# Altium PCB MC_Isolation_PCB.PcbDoc
Units mil, origin at the board's own origin, x right, y up, seen from the top; angles counter-clockwise.
Board outline 6000 x 4000 mil, 2 copper layers (Top Layer, Bottom Layer); 15 components, 13 nets, 65 pads, 0 vias.
Unrouted connection lines stored in the file: 1.
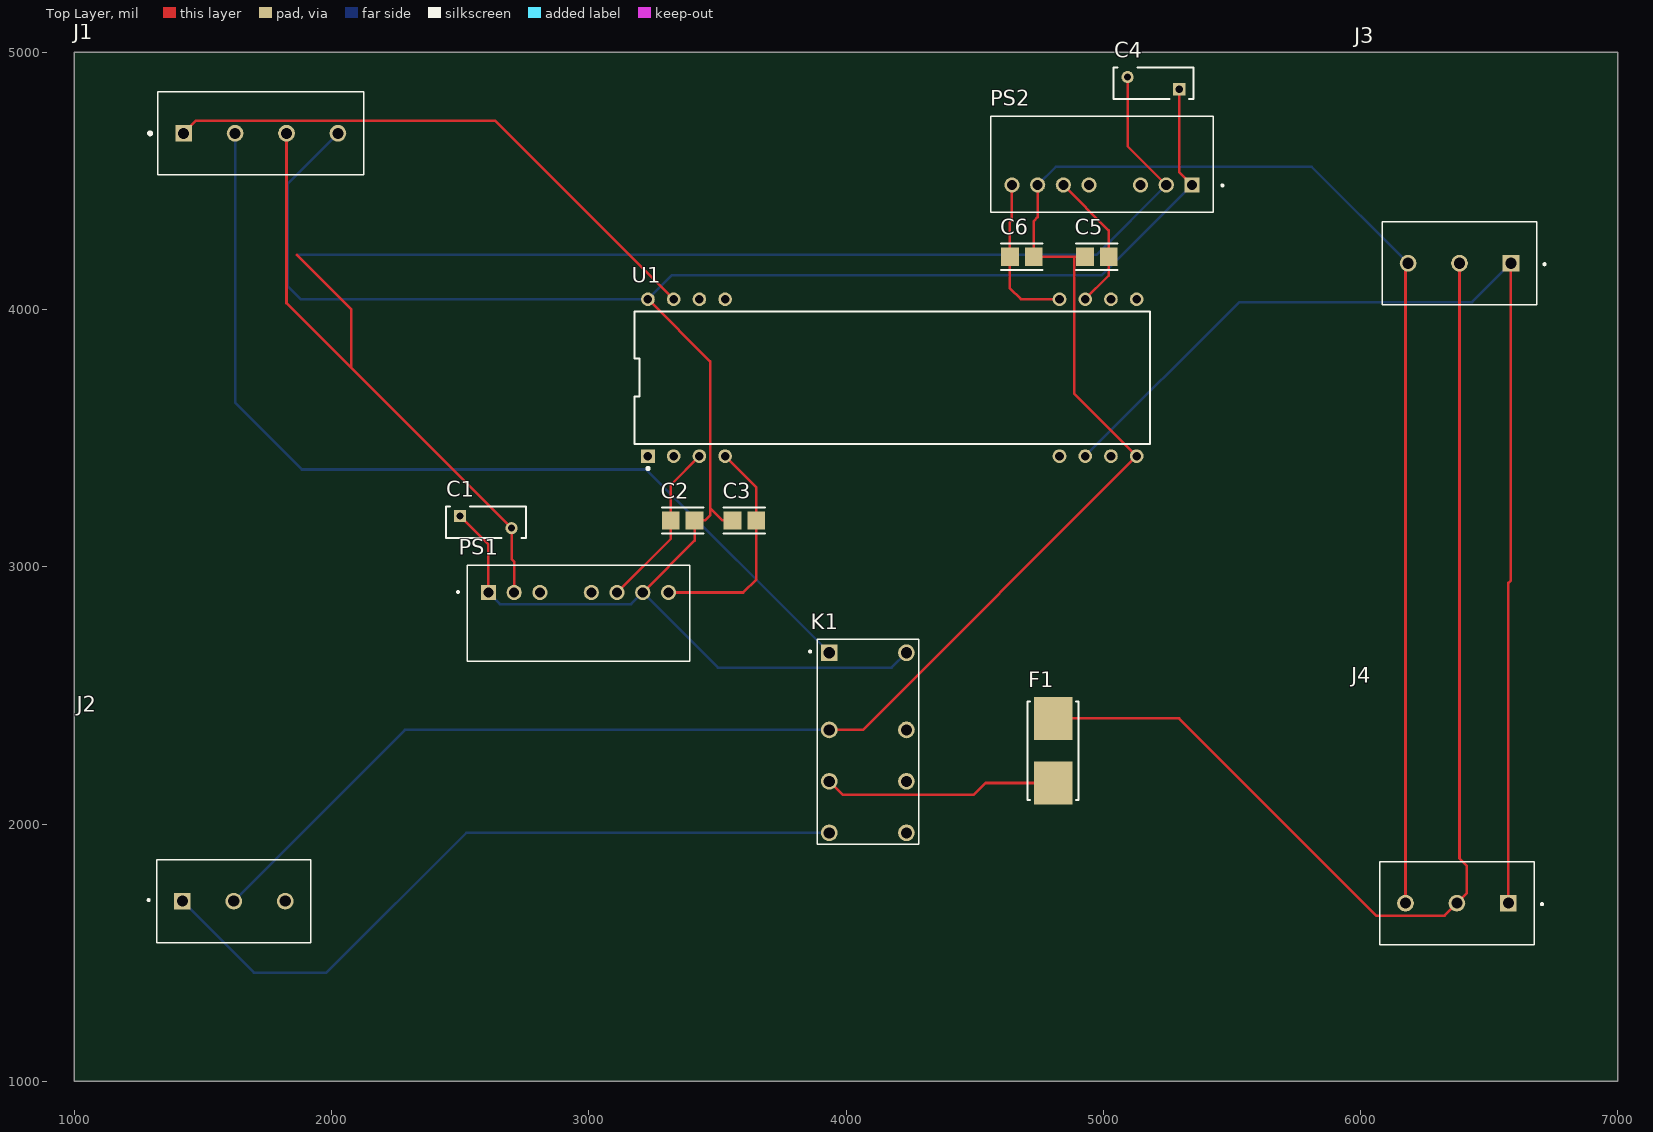
[diagram p0: Top Layer view]
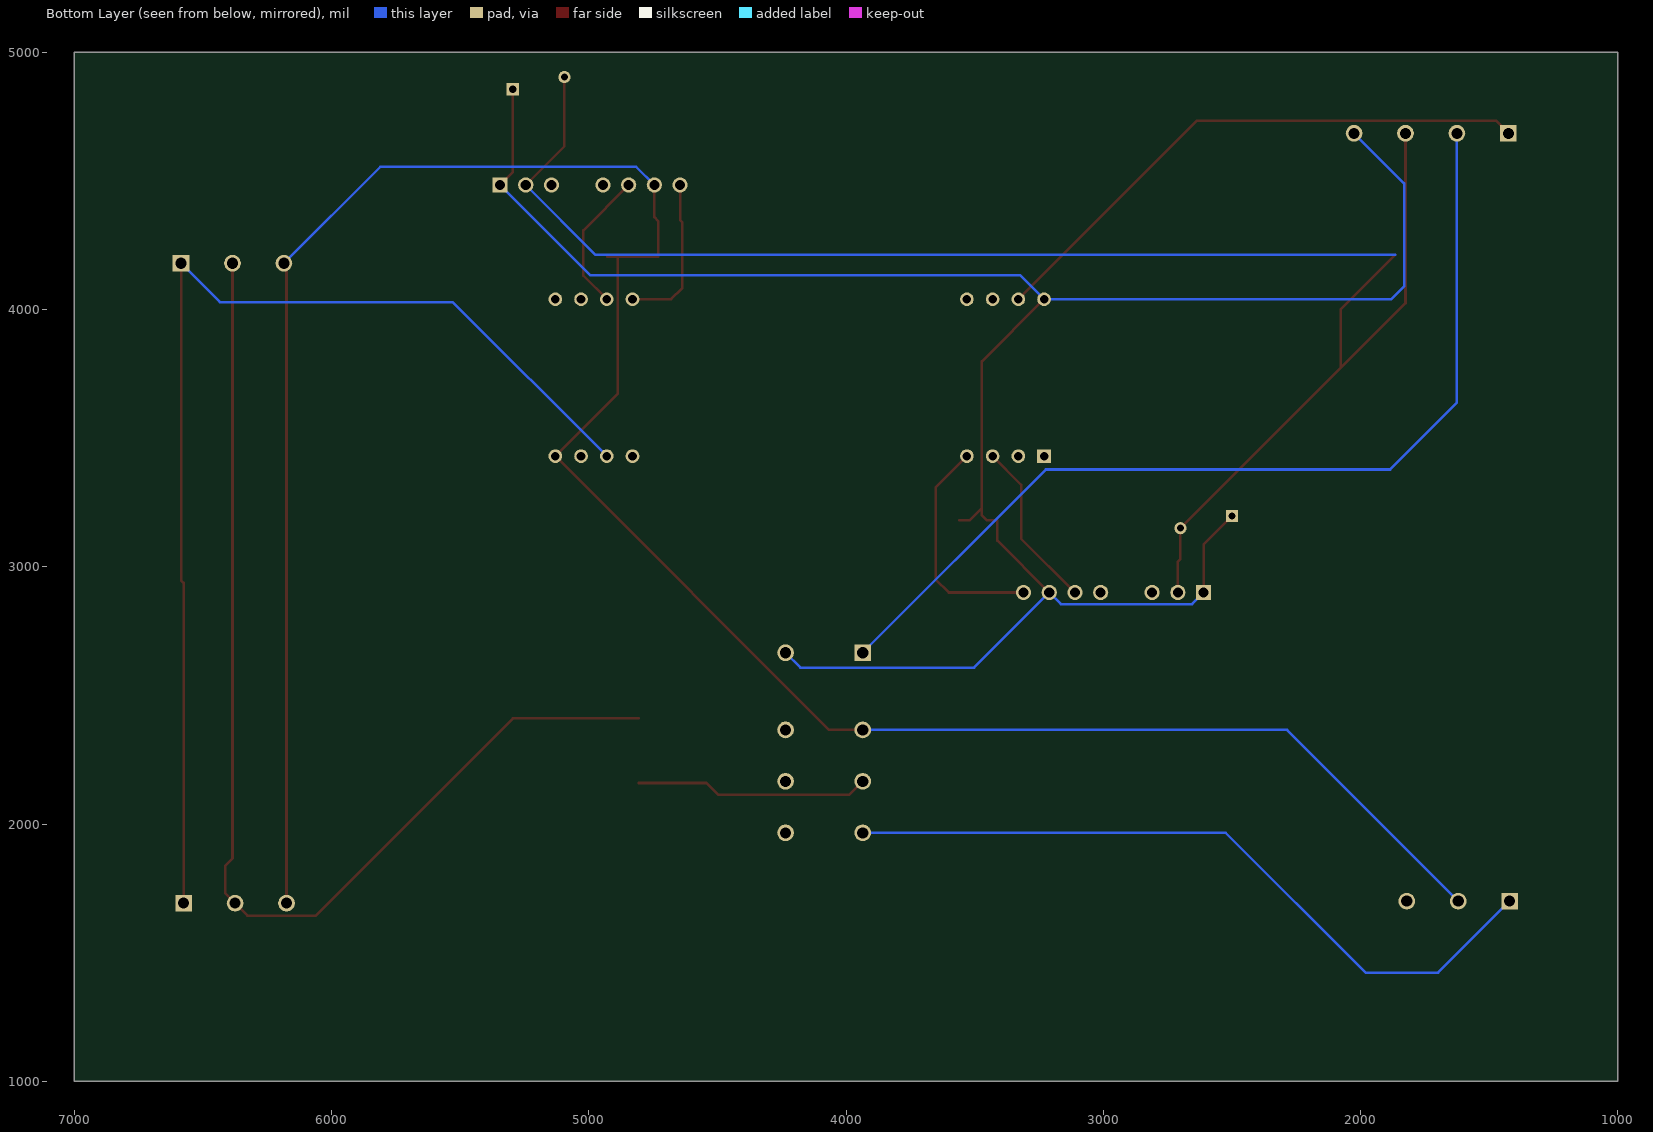
[diagram p1: Bottom Layer view, seen from below]
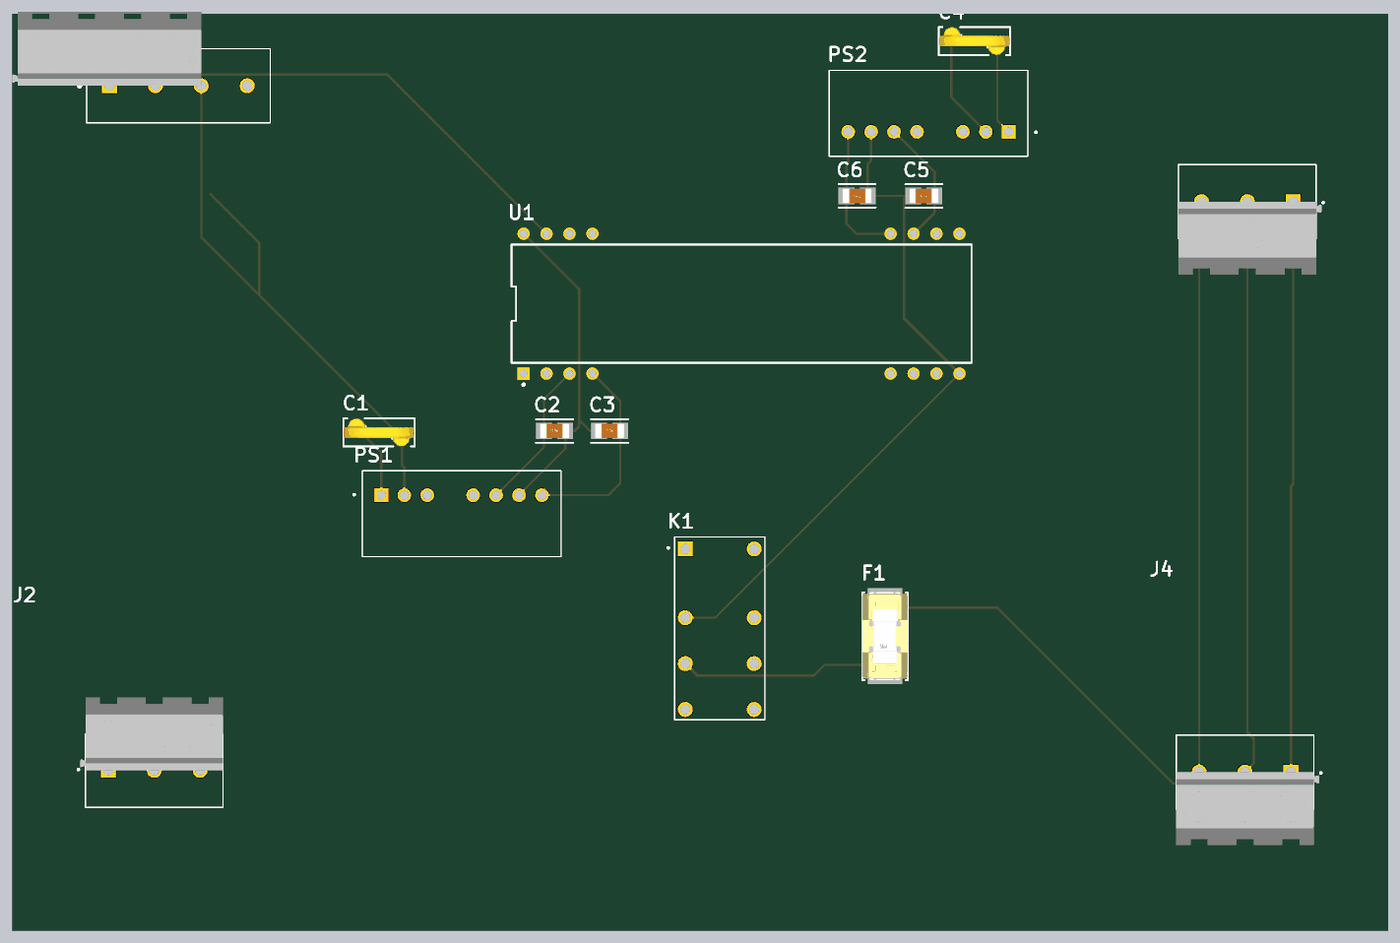
[diagram p2: 3D render of the assembled board from above, using the file's embedded part models]

## Layer stack, top to bottom
Top Solder: solder mask 0.4, Solder Resist, Dk 3.5
Top Layer: signal copper 1.4
Dielectric 1: dielectric 12.6, FR-4, Dk 4.8
Bottom Layer: signal copper 1.4
Bottom Solder: solder mask 0.4, Solder Resist, Dk 3.5

## Board outline
1000,1000 7000,1000 7000,5000 1000,5000

## Design rules (kind name [scope] priority, off if disabled: settings)
Clearance [All] p1: gap=10 ignorepadtopadclearanceinfootprint=FALSE except(0: Arc-Hole Track-Hole SMDPad-Hole THPad-Hole Via-Hole Fill-Hole Poly-Hole Region-Hole Text-Hole)
PolygonConnect [All] p1: connectstyle=Relief reliefconductorwidth=10 reliefentries=4 polygonreliefangle="90 Angle" airgapwidth=10
RoomDefinition MC_Isolation_Schematic [InComponentClass('MC_Isolation_Schematic')] p1: confinementstyle=ConfineIn formatcopy=TRUE lockcomponents=FALSE outline 7045,1060 9095,1060 9095,3220 7045,3220
RoutingVias [All] p1: holewidth=28 width=50 viastyle="Through Hole" minholewidth=28 minwidth=50 maxholewidth=28 maxwidth=50
SolderMaskExpansion [All] p1: expansion=4 istentingtop=FALSE
Width [All] p1: maxlimit=10 minlimit=10 preferedwidth=10
30 further rules are at their usual default settings.

## Components (designator, comment, footprint, x,y, rotation, side; value= is the part's Value field where it differs from the comment)
C1 "100uF" FP-MF-R050-MFG 2599.61,3173.62 r0 top value=0.41-0.77Ω
C2 "22uF" FP-C3216-160-0_2-IPC_B 3365,3180 r0 top
C3 "22uF" FP-C3216-160-0_2-IPC_B 3605,3180 r0 top
C4 "100uF" FP-MF-R050-MFG 5195,4880 r180 top value=0.41-0.77Ω
C5 "22uF" FP-C3216-160-0_2-IPC_B 4975,4205 r180 top
C6 "22uF" FP-C3216-160-0_2-IPC_B 4683.7,4205 r180 top
F1 "100mA" FP-0154-MFG 4805,2285 r90 top value=3.1Ω
J1 "282837-4" TE_282837-4 1425,4685 r0 top
J2 "282837-3" TE_282837-3 1620,1700 r0 top
J3 "282837-3" TE_282837-3 6385,4180 r180 top
J4 "282837-3" TE_282837-3 6375,1692.4 r180 top
K1 "V23105A5403A201" RELAY_1393793-8 4085,2320 r270 top
PS1 "PRM1W-E12-D15-S" CONV_PRM1W-E12-D15-S 2960,2819.29 r0 top
PS2 "PRM1W-E12-D15-S" CONV_PRM1W-E12-D15-S 4995,4565 r180 top
U1 "ISO121BG" FP-JVD0016A-MFG 4180,3735.02 r90 top

## Footprints (in the part's own frame and the unit in brackets; to place one, negate y for a bottom-side part, rotate by r counter-clockwise, add the part's x,y. Pads: shape width x height; smd on the part's side, far side on the other; paste and mask are expansions set on the pad)
CONV_PRM1W-E12-D15-S [mm]
  rect 1.508x1.508 hole 1: 1(-8.89,2.05)
  round 1.508 hole 1: 2(-6.35,2.05) 3(-3.81,2.05) 5(1.27,2.05) 6(3.81,2.05) 7(6.35,2.05) 8(8.89,2.05)
  silkscreen extent -12,-4.75 11,4.75
FP-0154-MFG [mil]
  rect 167x150 smd paste+0 mask+0: 1(-125.5,0) 2(125.5,0)
  silkscreen extent -192,-99 192,99, body extent -213,-103 213,103, height 10
FP-C3216-160-0_2-IPC_B [mil]
  rect 69.05x71.11 smd paste+0 mask+0: 1(-46.3,0) 2(46.3,0)
  silkscreen extent -81,-51 81,51, body extent -91,-45 91,45, height 10
FP-JVD0016A-MFG [mm]
  rect 1.35x1.35 hole 0.85 paste-1000 mask+0: 1(-7.748,24.13)
  round 1.35 hole 0.85 paste-1000 mask+0: 2(-7.748,21.59) 3(-7.748,19.05) 4(-7.748,16.51) 17(-7.748,-16.51) 18(-7.748,-19.05) 19(-7.748,-21.59) 20(-7.748,-24.13) 21(7.748,-24.13) 22(7.748,-21.59) 23(7.748,-19.05) 24(7.748,-16.51) 37(7.748,16.51) 38(7.748,19.05) 39(7.748,21.59) 40(7.748,24.13)
  silkscreen extent -9.1,-25.46 6.55,25.46
FP-MF-R050-MFG [mm]
  rect 1.2x1.2 hole 0.7 paste-1000 mask+0: 1(-2.55,0.6)
  round 1.2 hole 0.7 paste-1000 mask+0: 2(2.55,-0.6)
  silkscreen extent -3.95,-1.55 3.95,1.55, body extent -4.05,-1.65 4.05,1.65, height 0.25
RELAY_1393793-8 [mm]
  rect 1.65x1.65 hole 1.1: 1(-8.78,-3.81)
  round 1.65 hole 1.1: 4(-1.16,-3.81) 6(3.92,-3.81) 8(9,-3.81) 9(9,3.81) 11(3.92,3.81) 13(-1.16,3.81) 16(-8.78,3.81)
  silkscreen extent -10.1,-5.8 10.14,5
TE_282837-3 [mm]
  rect 1.65x1.65 hole 1.1: 1(-5.08,0)
  round 1.65 hole 1.1: 2(0,0) 3(5.08,0)
  silkscreen extent -8.5,-4.1 7.62,4.1, body extent -8.22,0 7.62,8.2, height 7.25
TE_282837-4 [mm]
  rect 1.65x1.65 hole 1.1: 1(0,0)
  round 1.65 hole 1.1: 2(5.08,0) 3(10.16,0) 4(15.24,0)
  silkscreen extent -3.46,-4.1 17.78,4.1, body extent -10.76,0 10.16,8.2, height 7.25

## Part data
C1 C4: library part CMP-07400-000037-1, "PTC RESET FUSE 60V 500MA RADIAL", Ambient Temperature Range High=+85°C, Ambient Temperature Range Low=-40°C, Current Rating=40A, Hold Current=0.5A, Manufacturer=Bourns, Manufacturer Part Number=MF-R050, Resistance=0.41-0.77Ω, Temperature="-40°C to +85°C", Trip Current=1A, Voltage Rating=60V, Automotive=No, Category=Fuse, ComponentLink2Description=Datasheet, ComponentLink2URL=https://upverter.com/datasheet/a1b715b2a3574ae967878e49fe70c2811aecae4b.pdf, Device Class L1="Circuit Protection", Device Class L2="PTC Resettable Fuses", Device Class L3=unset, Digikey Description="PTC RESET FUSE 60V 500MA RADIAL", Height=13.7mm, Lead Free=Yes, Mouser Description="PTC Resettable Fuse 0.5A(hold) 1A(trip) 60V 40A 0.75W 4s 0.41Ohm Radial 7.9 X 3.1mm Bulk", Octopart=https://octopart.com/mf-r050-bourns-19418, Package=MF-R050, RoHS=TRUE, Temperature Range High=+85°C, Temperature Range Low=-40°C, Trip Time=4s
C2 C3 C5 C6: library part CMP-2000-05402-2, "Multilayer Ceramic Capacitors 1uF ±10% 50V X7R SMD 1206", Capacitance=1uF, Case Code (Imperial)=1206, Case Code (Metric)=3216, Dielectric=X7R, Dielectric Material=Ceramic, Max Operating Temperature=125°C, Min Operating Temperature=-55°C, Package Quantity=2000, Tolerance=10%, Voltage=25V, Voltage Rating=50V, Case/Package=1206, Depth=1.6mm, Height=1.6mm, Lead Free="Lead Free", Length=0.126inch, Mount="Surface Mount", Number of Pins=2, Packaging="Tape and Reel", Radiation Hardening=No, REACH SVHC="No SVHC", Resistor Type=Ceramic, RoHS Compliant=Yes, Series=C, Termination=SMD/SMT, Thickness=0.071inch, Voltage Rating (DC)=50V, Weight=0.000571oz, Width=0.063inch
F1: library part CMP-08605-000075-1, "FUSE BOARD MNT 100MA 125VAC/VDC", Fuse Current=0.1A, Manufacturer="Littelfuse Inc", Manufacturer Part Number=0154.100DR, Max Fuse Ac Voltage=125V, Package=0154, Resistance=3.1Ω, Temperature="-55°C to +125°C", Temperature Range High=+125°C, Temperature Range Low=-55°C, Automotive=No, Category=Fuse, ComponentLink2Description=Datasheet, ComponentLink2URL=https://www.littelfuse.com/~/media/electronics/datasheets/fuses/littelfuse_fuse_154_154t_154l_154tl_datasheet.pdf.pdf, Device Class L1="Circuit Protection", Device Class L2=Fuses, Device Class L3=unset, Digikey Description="FUSE BOARD MNT 100MA 125VAC/VDC", Fuse Blow Speed=Fast, Fuse I2T=0.00138A2Sec, Height=3.81mm, Lead Free=Yes, Max Fuse Dc Voltage=125V, Mouser Description="Surface Mount Fuses Fuseblck w/ fuse .1A OMNI BLOK 154", Octopart=https://octopart.com/0154.100dr-littelfuse-557956, RoHS=TRUE, Voltage Rating=125V
J1: "4 Position Wire to Board Terminal Block Horizontal with Board 0.200 (5.08mm)", Package=None, Availability=Good, Check_prices=https://www.snapeda.com/parts/282837-4/TE%20Connectivity%20AMP%20Connectors/view-part/520354/?ref=eda, EU_RoHS_Compliance="Compliant with Exemptions", MF="TE Connectivity", MP=282837-4, Price=None, Purchase-URL=https://pricing.snapeda.com/search/part/282837-4/?ref=eda, SnapEDA_Link=https://www.snapeda.com/parts/282837-4/TE%20Connectivity%20AMP%20Connectors/view-part/520354/?ref=snap
J2 J3 J4: "Wire to Board 3 Position 5.08 mm Pitch 30-16 AWG Euro Style Terminal Block", Package=None, Availability=Good, Check_prices=https://www.snapeda.com/parts/282837-3/TE%20Connectivity%20AMP%20Connectors/view-part/2765182/?ref=eda, MF="TE Connectivity", MP=282837-3, Price=None, Purchase-URL=https://pricing.snapeda.com/search/part/282837-3/?ref=eda, SnapEDA_Link=https://www.snapeda.com/parts/282837-3/TE%20Connectivity%20AMP%20Connectors/view-part/2765182/?ref=snap
K1: Package=None, Availability=Unavailable, MP=V23105A5403A201, Price=None
PS1 PS2: "1 W, 8:1 Input Range, Single/Dual Regulated Output, 8 Pin SIP, 3000 Vdc Isolation, Dc-Dc Converter", Package=None, Availability=Unavailable, MF="{'manufacturer': u'CUI'}", MP=PRM1W-E12-D15-S, Price=None
U1: library part CMP-0998-00014-3, "IC OPAMP ISOLATION 1 CIRC 16CDIP", Input Offset Voltage (Vos)=100mV, Input Resistance=200kR, Max Dual Supply Voltage=18V, Max Operating Temperature=125°C, Min Dual Supply Voltage=4.5V, Min Operating Temperature=-55°C, Operating Supply Current=4mA, Output Current per Channel=15mA, Package Quantity=1, Voltage Gain=0dB, -3db Bandwidth=60kHz, Lead Free="Lead Free", Number of Channels=1, Number of Circuits=1, Number of Elements=1, Number of Pins=16, Operating Supply Voltage=18V, Packaging=Rail/Tube, Radiation Hardening=No, RoHS Compliant=Yes, Slew Rate=2V/µs

## Nets (pads, with @x,y where several pads share a name; then routed paths per layer and width w, separated by ;. In a path a pad name is that pad's centre, name@x,y a point inside that pad or via, vN(x,y) a via of type N, cw(c..) or ccw(c..) an arc to the next point about the centre after c; other vN are vias at no path point)
GLV_12V: C1.2 C4.2 J1.3 PS1.2 PS2.2 | length 6652.8
  Top Layer w10: J1.3 1825,4025 2077,3773 ; 1865.16,4212.4 2077,4000.56 2077,3773 ; PS1.2 2710,3020 2700,3030 C1.2 2077,3773 ; C4.2 5094.61,4634.69 PS2.2
  Bottom Layer w10: 1865.16,4212.4 4973.11,4212.4 PS2.2
GND_IN: C1.1 C2.2 C3.1 C4.1 J1.4 K1.16 PS1.1 PS1.7 PS2.1 U1.40 | length 8417.6
  Top Layer w10: C1.1 2610,3086.46 PS1.1 ; PS1.7 3411.3,3101.3 C2.2 3452,3180 3472,3200 3472,3228 ; U1.40 3472,3798.04 3472,3228 ; C3.1 3520,3180 3472,3228 ; C4.1 5295.39,4533.9 PS2.1
  Bottom Layer w10: J1.4 1830,4490 1830,4090.04 1880,4040.04 U1.40 3323.96,4134 4994.71,4134 PS2.1 ; PS1.1 2655,2855 3165,2855 PS1.7 3502,2608 4177.33,2608 K1.16
GND_OUT: C5.2 C6.1 J2.2 J3.3 J4.3 K1.4 PS2.7 U1.20 | length 9702.4
  Top Layer w10: K1.4 4065.67,2365.67 U1.20 4888,3672 4888,4205 ; PS2.7 4745,4359 4730,4344 C6.1 4888,4205 ; C5.2 4888,4205 ; J4.3 6175,4170 J3.3
  Bottom Layer w10: J2.2 2285.67,2365.67 K1.4 ; PS2.7 4815.71,4555 5810,4555 J3.3
Ignition_In: J1.2 K1.1 | length 3759.8
  Bottom Layer w10: J1.2 1625,3638 1885,3378 3222.67,3378 K1.1
Ignition_Out: F1.2 J3.2 J4.2 | length 4422.5
  Top Layer w10: F1.2 5294.5,2410.5 6061,1644 6326.6,1644 J4.2 6413,1730.4 6413,1838 6385,1866 J3.2
NetC2_1: C2.1 PS1.6 U1.3 | length 662.5
  Top Layer w10: PS1.6 3318.7,3108.7 C2.1 3318.7,3318.7 U1.3
NetC3_2: C3.2 PS1.8 U1.4 | length 891.5
  Top Layer w10: PS1.8 3600,2900 3651.3,2951.3 C3.2 3651.3,3308.7 U1.4
NetC5_1: C5.1 PS2.6 U1.23 | length 555.1
  Top Layer w10: PS2.6 5021.3,4307.99 C5.1 5021.3,4131.34 U1.23
NetC6_2: C6.2 PS2.8 U1.24 | length 615.1
  Top Layer w10: PS2.8 4645,4347.61 4637.39,4340 C6.2 4637.39,4082.65 4680,4040.04 U1.24
NetF1_1: F1.1 K1.6 | length 910.2
  Top Layer w10: K1.6 3986.67,2114 4497,2114 4542.5,2159.5 F1.1
NetJ2_1: J2.1 K1.8 | length 2855.3
  Bottom Layer w10: J2.1 1698,1422 1980,1422 2523.67,1965.67 K1.8
Throttle_In: J1.1 U1.39 | length 2212.7
  Top Layer w10: J1.1 1474,4734 2636.04,4734 U1.39
Throttle_Out: J3.1 J4.1 U1.18 | length 4457.4
  Top Layer w10: J4.1 6575,2937 6585,2947 J3.1
  Bottom Layer w10: U1.18 5529,4029 6434,4029 J3.1
pads on no net: J2.3 K1.9 K1.11 K1.13 PS1.3 PS1.5 PS2.3 PS2.5 U1.1 U1.2 U1.17 U1.19 U1.21 U1.22 U1.37 U1.38